# Altium PCB 线圈.PcbDoc
Units mil, origin at the board's own origin, x right, y up, seen from the top; angles counter-clockwise.
Board outline 3937.01 x 1259.84 mil, 4 copper layers (Top Layer, MidLayer1, MidLayer2, Bottom Layer); 1 components, 1 nets, 2 pads, 2 vias.
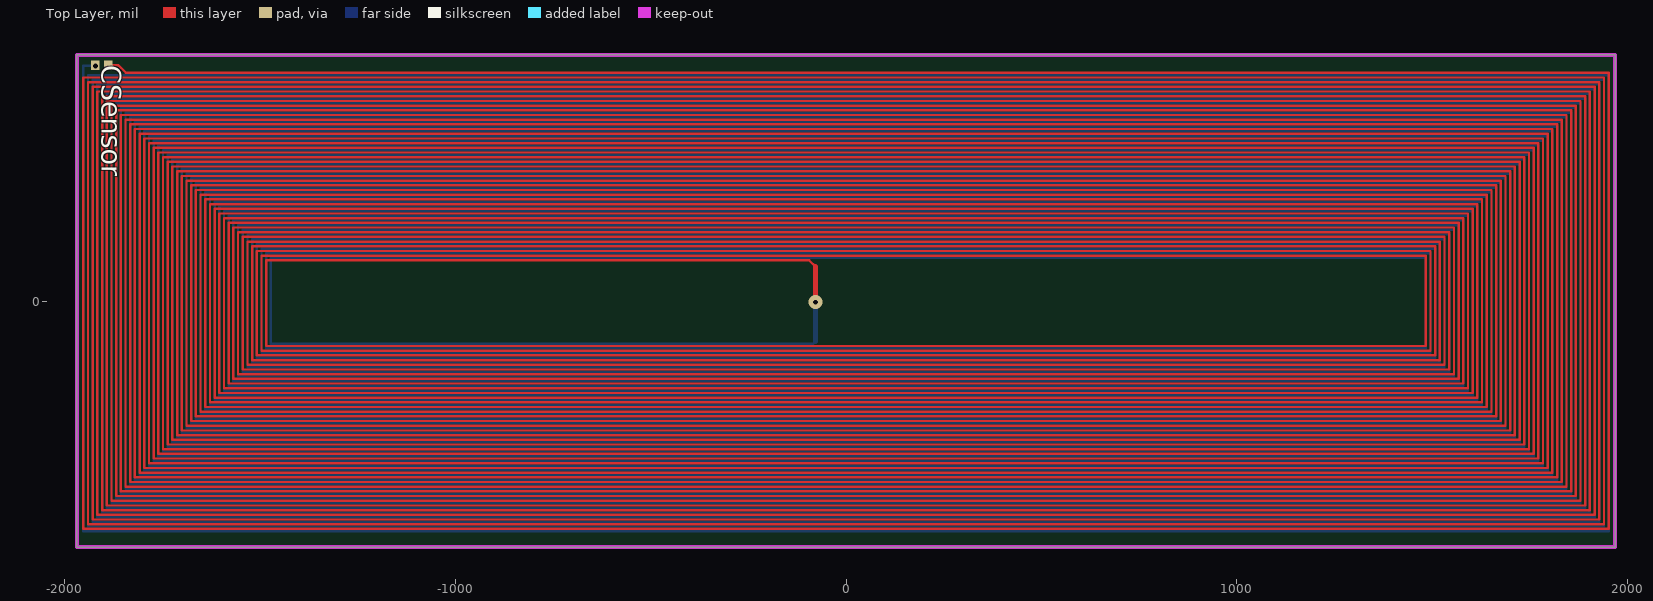
[diagram p0: Top Layer view]
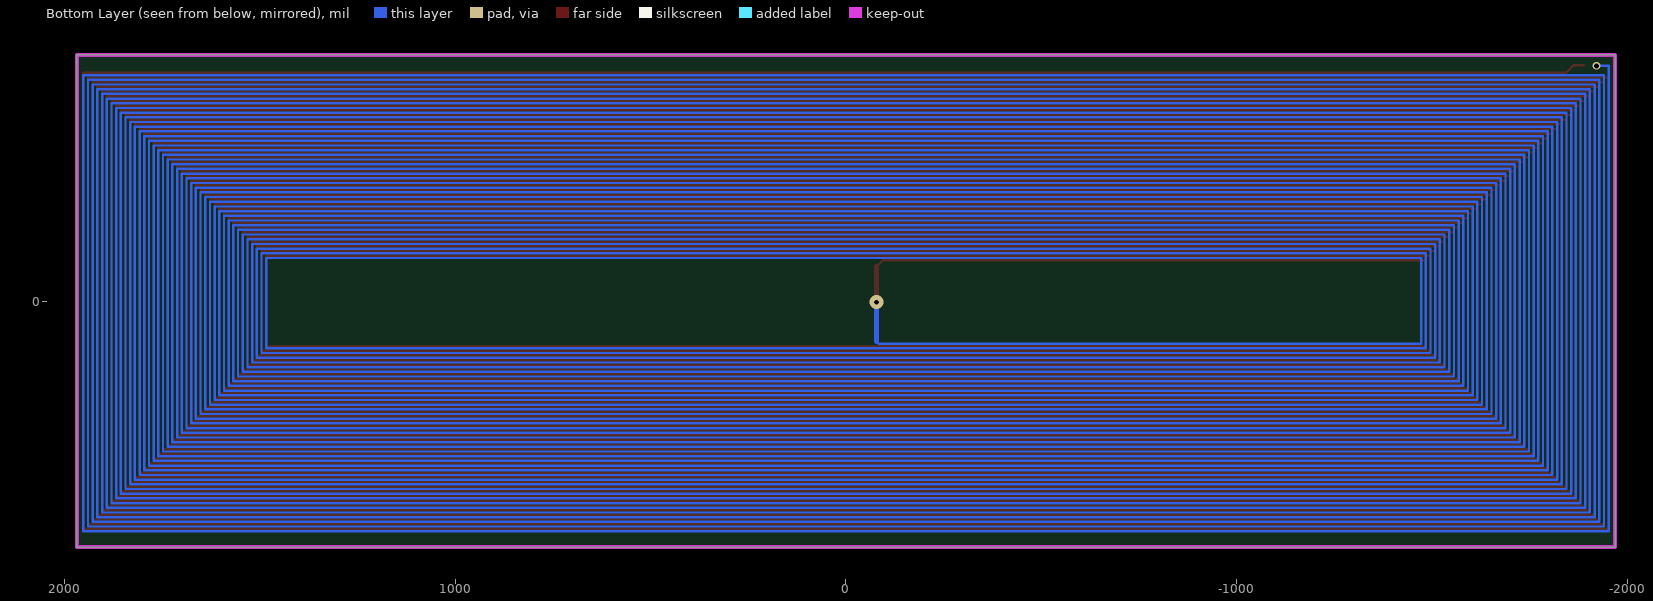
[diagram p1: Bottom Layer view, seen from below]

## Layer stack, top to bottom
Top Layer: signal copper 1.4
Dielectric: core 12.6, FR-4, Dk 4.8
MidLayer1: signal copper 1.4
Dielectric: prepreg 12.6, FR-4, Dk 4.8
MidLayer2: signal copper 1.4
Dielectric: core 12.6, FR-4, Dk 4.8
Bottom Layer: signal copper 1.4

## Board outline
-1968.5,-629.92 1968.5,-629.92 1968.5,629.92 -1968.5,629.92

## Design rules (kind name [scope] priority, off if disabled: settings)
Clearance [All] p1: gap=6
PlaneConnect [All] p1: planeconnectstyle=Direct reliefexpansion=20 reliefentries=4 reliefconductorwidth=10 reliefairgap=10
PolygonConnect [All] p1: connectstyle=Direct reliefconductorwidth=10 reliefentries=4 polygonreliefangle="90 Angle" airgapwidth=10
RoutingVias [All] p1: holewidth=28 width=50 viastyle="Through Hole" minholewidth=28 minwidth=50 maxholewidth=28 maxwidth=50
SolderMaskExpansion [All] p1: expansion=4
Width [All] p1: maxlimit=10 minlimit=6 preferedwidth=10 minimp=50.000000 maximp=50.000000 favimp=50.000000
27 further rules are at their usual default settings.

## Components (designator, comment, footprint, x,y, rotation, side; value= is the part's Value field where it differs from the comment)
CSensor "Comment" 0402 -1905,603 r0 top

## Footprints (in the part's own frame and the unit in brackets; to place one, negate y for a bottom-side part, rotate by r counter-clockwise, add the part's x,y. Pads: shape width x height; smd on the part's side, far side on the other; paste and mask are expansions set on the pad)
0402 [mil]
  rect 22x24 smd: 1(-16.5,0) 2(16.5,0)

## Via types
v1: diameter 20, hole 13, Top Layer to Bottom Layer, 1 vias
v2: diameter 36/36/36/36 (per signal layer), hole 12, Top Layer to Bottom Layer, 1 vias

## Nets (pads, with @x,y where several pads share a name; then routed paths per layer and width w, separated by ;. In a path a pad name is that pad's centre, name@x,y a point inside that pad or via, vN(x,y) a via of type N, cw(c..) or ccw(c..) an arc to the next point about the centre after c; other vN are vias at no path point)
3: CSensor.1 CSensor.2 | length 664847.6
  Top Layer w6: CSensor.2 -1862,603 -1843.07,584.07 1952,584.07 1952,-583.27 -1952,-583.27 -1952,572.07 1940,572.07 1940,-571.27 -1940,-571.27 -1940,560.07 1928,560.07 1928,-559.27 -1928,-559.27 -1928,548.07 1915,548.07 ; -78.17,88.17 -94,104 -1484,104 -1484,-115.27 1484,-115.27 1484,116.07 -1496,116.07 -1496,-127.27 1496,-127.27 1496,128.07 -1508,128.07 -1508,-139.27 1508,-139.27 1508,140.07 -1520,140.07 -1520,-151.27 1520,-151.27 1520,152.07 -1532,152.07 -1532,-163.27 1532,-163.27 1532,164.07 -1544,164.07 -1544,-175.27 1544,-175.27 1544,176.07 -1556,176.07 -1556,-187.27 1556,-187.27 1556,188.07 -1568,188.07 -1568,-199.27 1568,-199.27 1568,200.07 -1580,200.07 -1580,-211.27 1580,-211.27 1580,212.07 -1592,212.07 -1592,-223.27 1592,-223.27 1592,224.07 -1604,224.07 -1604,-235.27 1604,-235.27 1604,236.07 -1616,236.07 -1616,-247.27 1616,-247.27 1616,248.07 -1628,248.07 -1628,-259.27 1628,-259.27 1628,260.07 -1640,260.07 -1640,-271.27 1640,-271.27 1640,272.07 -1652,272.07 -1652,-283.27 1652,-283.27 1652,284.07 -1664,284.07 -1664,-295.27 1664,-295.27 1664,296.07 -1676,296.07 -1676,-307.27 1676,-307.27 1676,308.07 -1688,308.07 -1688,-319.27 1688,-319.27 1688,320.07 -1700,320.07 -1700,-331.27 1700,-331.27 1700,332.07 -1712,332.07 -1712,-343.27 1712,-343.27 1712,344.07 -1724,344.07 -1724,-355.27 1724,-355.27 1724,356.07 -1736,356.07 -1736,-367.27 1736,-367.27 1736,368.07 -1748,368.07 -1748,-379.27 1748,-379.27 1748,380.07 -1760,380.07 -1760,-391.27 1760,-391.27 1760,392.07 -1772,392.07 -1772,-403.27 1772,-403.27 1772,404.07 -1784,404.07 -1784,-415.27 1784,-415.27 1784,416.07 -1796,416.07 -1796,-427.27 1796,-427.27 1796,428.07 -1808,428.07 -1808,-439.27 1808,-439.27 1808,440.07 -1820,440.07 -1820,-451.27 1820,-451.27 1820,452.07 -1832,452.07 -1832,-463.27 1832,-463.27 1832,464.07 -1844,464.07 -1844,-475.27 1844,-475.27 1844,476.07 -1856,476.07 -1856,-487.27 1856,-487.27 1856,488.07 -1868,488.07 -1868,-499.27 1868,-499.27 1868,500.07 -1880,500.07 -1880,-511.27 1880,-511.27 1880,512.07 -1892,512.07 -1892,-523.27 1892,-523.27 1892,524.07 -1904,524.07 -1904,-535.27 1904,-535.27 1904,536.07 -1916,536.07 -1916,-547.27 1915,-547.27 ; 1916,-547.27 1916,548.07
  Top Layer w12: v2@-78.17,-2.6 -78.17,88.17
  Bottom Layer w6: v1(-1921,602) -1952,602 -1952,-589.27 1952,-589.27 1952,578.07 -1940,578.07 -1940,-577.27 1940,-577.27 1940,566.07 -1928,566.07 -1928,-565.27 1928,-565.27 1928,554.07 -1916,554.07 -1916,-553.27 1916,-553.27 1916,542.07 -1904,542.07 -1904,-541.27 1904,-541.27 1904,530.07 -1892,530.07 -1892,-529.27 1892,-529.27 1892,518.07 -1880,518.07 -1880,-517.27 1880,-517.27 1880,506.07 -1868,506.07 -1868,-505.27 1868,-505.27 1868,494.07 -1856,494.07 -1856,-493.27 1856,-493.27 1856,482.07 -1844,482.07 -1844,-481.27 1844,-481.27 1844,470.07 -1832,470.07 -1832,-469.27 1832,-469.27 1832,458.07 -1820,458.07 -1820,-457.27 1820,-457.27 1820,446.07 -1808,446.07 -1808,-445.27 1808,-445.27 1808,434.07 -1796,434.07 -1796,-433.27 1796,-433.27 1796,422.07 -1784,422.07 -1784,-421.27 1784,-421.27 1784,410.07 -1772,410.07 -1772,-409.27 1772,-409.27 1772,398.07 -1760,398.07 -1760,-397.27 1760,-397.27 1760,386.07 -1748,386.07 -1748,-385.27 1748,-385.27 1748,374.07 -1736,374.07 -1736,-373.27 1736,-373.27 1736,362.07 -1724,362.07 -1724,-361.27 1724,-361.27 1724,350.07 -1712,350.07 -1712,-349.27 1712,-349.27 1712,338.07 -1700,338.07 -1700,-337.27 1700,-337.27 1700,326.07 -1688,326.07 -1688,-325.27 1688,-325.27 1688,314.07 -1676,314.07 -1676,-313.27 1676,-313.27 1676,302.07 -1664,302.07 -1664,-301.27 1664,-301.27 1664,290.07 -1652,290.07 -1652,-289.27 1652,-289.27 1652,278.07 -1640,278.07 -1640,-277.27 1640,-277.27 1640,266.07 -1628,266.07 -1628,-265.27 1628,-265.27 1628,254.07 -1616,254.07 -1616,-253.27 1616,-253.27 1616,242.07 -1604,242.07 -1604,-241.27 1604,-241.27 1604,230.07 -1592,230.07 -1592,-229.27 1592,-229.27 1592,218.07 -1580,218.07 -1580,-217.27 1580,-217.27 1580,206.07 -1568,206.07 -1568,-205.27 1568,-205.27 1568,194.07 -1556,194.07 -1556,-193.27 1556,-193.27 1556,182.07 -1544,182.07 -1544,-181.27 1544,-181.27 1544,170.07 -1532,170.07 -1532,-169.27 1532,-169.27 1532,158.07 -1520,158.07 -1520,-157.27 1520,-157.27 1520,146.07 -1508,146.07 -1508,-145.27 1508,-145.27 1508,134.07 -1496,134.07 -1496,-133.27 1496,-133.27 1496,122.07 -1484,122.07 -1484,-121.27 1484,-121.27 1484,110.07 -1472,110.07 -1472,-109 -83,-109 -78.17,-104.17
  Bottom Layer w12: -78.17,-104.17 v2@-78.17,-2.6
  other v2: -78,-3

## Keep-outs
Keep-Out Layer:
  the board outline again, w10

## Other copper
Multi-Layer:
  text "Exported from WEBENCH Coil Designer Tool" at -1086,1199 h51
  text "WEBENCH Design Information" at -1415,1090 h32
  text "Coil Parameters" at 199,1080 h32
  text "-------------------------" at -1415,1048 h32
  text "--------------" at 199,1039 h32
  text "User Id - 3988952" at -1415,1007 h32
  text "Layers = 2" at 199,997 h32
  text "Design Id - 9" at -1415,965 h32
  text "Turns = 40" at 199,956 h32
  text "Exported on - 2015/12/29 04:20:10" at -1415,924 h32
  text "Trace Width = 6.0 mils" at 199,914 h32
  text "Version - 1.0" at -1415,882 h32
  text "Trace Spacing = 6.0 mils" at 199,872 h32
  text "Inner Diameter = 221 mils (Approx.)" at 199,831 h32
  text "Outer Diameter = 1181 mils (Approx.)" at 199,789 h32